# EAGLE board Small Antenna V2.1 (EAGLE 8.2.2)
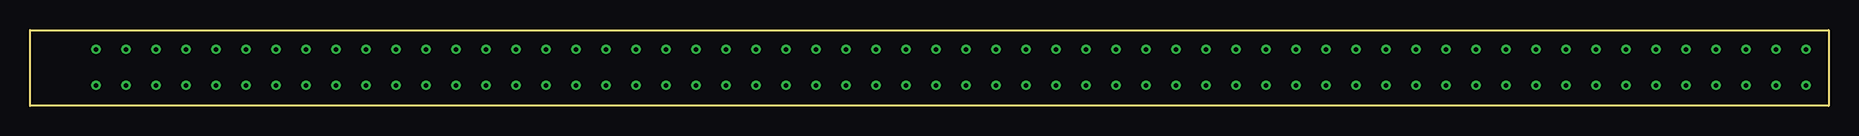
[diagram p0: board, top side]
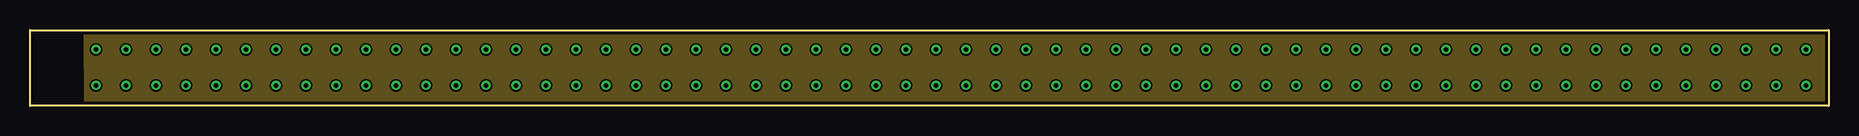
[diagram p1: board, inner layer Route2]
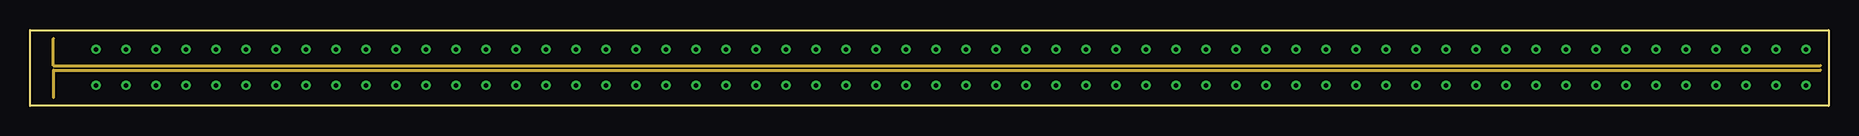
[diagram p2: board, inner layer Route15]
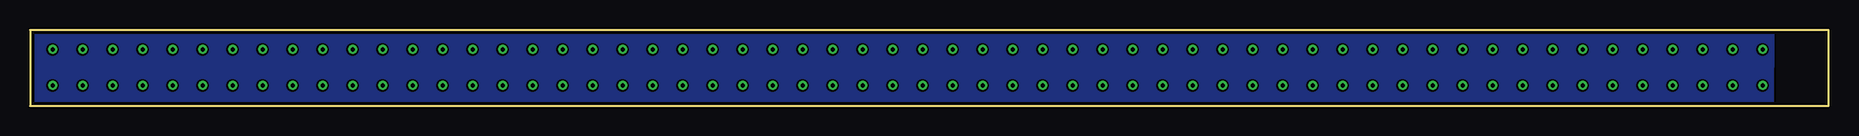
[diagram p3: board, bottom side, seen from below]

Size 149.89 x 6.32 mm. Coordinates in mm from the lower left corner, seen from the top.
Outline: 0,0 0,6.32 149.88,6.32 149.88,0 0,0
Copper layers (1*2*15*16): Top 0.035mm / dielectric 0.2mm / Route2 0.035mm / dielectric 0.2mm / Route15 0.035mm / dielectric 0.2mm / Bottom 0.035mm
Design rules "default *": minimum track width 6mil, minimum drill 0.35mm, track to track 6mil, track to pad 6mil, pad to pad 6mil, via to via 6mil, smd to smd 6mil, copper to edge 10mil, drill to drill 6mil, minimum pad ring 10mil, minimum via ring 8mil, stop-mask expansion 4mil, vias tented up to drill 0mil, thermal gap 10mil

## Footprints (pad centres in the part's own frame; a part is rotated, then mirrored left to right if it is on the bottom)
C0603 = smd 1.1 x 1: 1 -0.85,0; 2 0.85,0
R0402 = smd 0.7 x 0.9: 1 -0.65,0; 2 0.65,0
SOT23 = smd 1 x 1.4: 1 -0.95,-1.1; 2 0.95,-1.1; 3 0,1.1
D8 = smd 1.981 x 0.559: 1 -2.464,1.905; 2 -2.464,0.635; 3 -2.464,-0.635; 4 -2.464,-1.905; 5 2.464,-1.905; 6 2.464,-0.635; 7 2.464,0.635; 8 2.464,1.905
SOIC254P1030X390-8N = smd 1.7 x 1.45: 1 -4.7,3.81; 2 -4.7,1.27; 3 -4.7,-1.27; 4 -4.7,-3.81; 5 4.7,-3.81; 6 4.7,-1.27; 7 4.7,1.27; 8 4.7,3.81
BATTERYHOLDDER = smd 3 x 2.8: + -8.1,-0.1; +2 8.4,-0.1 | smd 5 x 5: - 0.15,-0.1
MC-921 = smd 1 x 1.05: 1 0,1.528 | smd 1.05 x 2.2: 2@1 -1.475,0; 2@2 1.475,0

## Placement (x,y rotation side)
C1  [C0603]  90.5,45.2 0 top  (outside the outline)
C2  [C0603]  61.5,22.7 0 top  (outside the outline)
C3  [C0603]  67.5,17.2 270 top  (outside the outline)
C4  [C0603]  76,43.2 0 top  (outside the outline)
R1  [R0402]  90.5,73.2 0 top  (outside the outline)
R2  [R0402]  90.5,69.2 0 top  (outside the outline)
R3  [R0402]  90.5,65.2 0 top  (outside the outline)
R4  [R0402]  90.5,61.2 0 top  (outside the outline)
R5  [R0402]  90.5,57.2 0 top  (outside the outline)
R6  [R0402]  70.5,77.2 0 top  (outside the outline)
R7  [R0402]  64.5,64.2 0 top  (outside the outline)
R8  [R0402]  64.5,60.2 0 top  (outside the outline)
R9  [R0402]  90.5,37.2 0 top  (outside the outline)
R10  [R0402]  60,19.2 0 top  (outside the outline)
R11  [R0402]  60,15.2 0 top  (outside the outline)
R12  [R0402]  64.5,41.2 0 top  (outside the outline)
T1  BC856  [SOT23]  64.5,55.2 0 top  (outside the outline)
U$3  TLV2761ID  [D8]  68.5,69.7 0 top  (outside the outline)
U$5  HCNR200  [SOIC254P1030X390-8N]  79,29.2 90 top  (outside the outline)
U$12  CR1025BATTERYHOLDER  [BATTERYHOLDDER]  99.5,30.7 90 top  (outside the outline)
X1  MC-921  [MC-921]  60.5,29.2 0 top  (outside the outline)

## Library data of the parts
C1-C4 = eagle-ltspice; SPICEMODEL: NONE; SPICEPREFIX: C
R1-R12 = eagle-ltspice; SPICEMODEL: NONE; SPICEPREFIX: R
T1 = nxp_60_1_1
U$3 = TLV2761-SOIC8; MANUFACTURER_PART_NUMBER: tlv2761_d_8; VENDOR: Texas Instruments
U$5 = IL300
U$12 = MyParts
X1 = con-coax; OC_FARNELL: unknown; OC_NEWARK: unknown

## Nets
GND: U$5.5 X1.2@1 X1.2@2
N$1: R1.2 R2.2
N$2: R1.1 R3.2
N$3: C1.2 R2.1 R4.2
N$4: C1.1 R3.1 R5.2
N$5: R4.1 R6.2 U$3.2
N$6: R5.1 U$3.3
N$7: R6.1 R7.2 U$3.1
N$8: C4.2 R7.1 R8.2 U$3.6 U$5.3
N$9: R9.1
N$10: R12.2 T1.2
N$11: C4.1 T1.1 U$3.7
N$12: T1.3 U$5.2
N$13: U$5.6 X1.1
VCM: C2.1 R9.2 R10.1 R11.2 U$3.5 U$5.4
VHF: C3.1 R8.1 R10.2 R12.1 U$3.8 U$12.+ U$12.+2
VHL: U$3.4 U$5.1
VLF: C2.2 C3.2 R11.1 U$12.-

## Tracks (layer width: path | path; a pad name or v marks a point on that pad's centre or on a via)
GND  (2 unrouted)
N$1  (1 unrouted)
N$2  (1 unrouted)
N$3  (2 unrouted)
N$4  (2 unrouted)
N$5  (2 unrouted)
N$6  (1 unrouted)
N$7  (2 unrouted)
N$8  (4 unrouted)
N$10  (1 unrouted)
N$11  (2 unrouted)
N$12  (1 unrouted)
N$13  (1 unrouted)
S$1
  Route15 0.254: 1.96,0.71 1.96,2.97 149.22,2.97
S$2
  Route15 0.254: 1.96,5.61 1.96,3.35 149.2,3.35
S$3  (via drill 0.35)
  other vias: 5.5,4.7
S$4  (via drill 0.35)
  other vias: 10.5,4.7
S$5  (via drill 0.35)
  other vias: 13,4.7
S$6  (via drill 0.35)
  other vias: 8,4.7
S$7  (via drill 0.35)
  other vias: 15.5,4.7
S$8  (via drill 0.35)
  other vias: 18,4.7
S$9  (via drill 0.35)
  other vias: 20.5,4.7
S$10  (via drill 0.35)
  other vias: 23,4.7
S$11  (via drill 0.35)
  other vias: 25.5,4.7
S$12  (via drill 0.35)
  other vias: 28,4.7
S$13  (via drill 0.35)
  other vias: 30.5,4.7
S$14  (via drill 0.35)
  other vias: 33,4.7
S$15  (via drill 0.35)
  other vias: 35.5,4.7
S$16  (via drill 0.35)
  other vias: 38,4.7
S$17  (via drill 0.35)
  other vias: 40.5,4.7
S$18  (via drill 0.35)
  other vias: 43,4.7
S$19  (via drill 0.35)
  other vias: 45.5,4.7
S$20  (via drill 0.35)
  other vias: 48,4.7
S$21  (via drill 0.35)
  other vias: 50.5,4.7
S$22  (via drill 0.35)
  other vias: 53,4.7
S$23  (via drill 0.35)
  other vias: 55.5,4.7
S$24  (via drill 0.35)
  other vias: 58,4.7
S$25  (via drill 0.35)
  other vias: 60.5,4.7
S$26  (via drill 0.35)
  other vias: 63,4.7
S$27  (via drill 0.35)
  other vias: 65.5,4.7
S$28  (via drill 0.35)
  other vias: 68,4.7
S$29  (via drill 0.35)
  other vias: 70.5,4.7
S$30  (via drill 0.35)
  other vias: 73,4.7
S$31  (via drill 0.35)
  other vias: 75.5,4.7
S$32  (via drill 0.35)
  other vias: 78,4.7
S$33  (via drill 0.35)
  other vias: 80.5,4.7
S$34  (via drill 0.35)
  other vias: 83,4.7
S$35  (via drill 0.35)
  other vias: 85.5,4.7
S$36  (via drill 0.35)
  other vias: 88,4.7
S$37  (via drill 0.35)
  other vias: 90.5,4.7
S$38  (via drill 0.35)
  other vias: 93,4.7
S$39  (via drill 0.35)
  other vias: 95.5,4.7
S$40  (via drill 0.35)
  other vias: 98,4.7
S$41  (via drill 0.35)
  other vias: 100.5,4.7
S$42  (via drill 0.35)
  other vias: 103,4.7
S$43  (via drill 0.35)
  other vias: 105.5,4.7
S$44  (via drill 0.35)
  other vias: 108,4.7
S$45  (via drill 0.35)
  other vias: 110.5,4.7
S$46  (via drill 0.35)
  other vias: 113,4.7
S$47  (via drill 0.35)
  other vias: 115.5,4.7
S$48  (via drill 0.35)
  other vias: 118,4.7
S$49  (via drill 0.35)
  other vias: 120.5,4.7
S$50  (via drill 0.35)
  other vias: 123,4.7
S$51  (via drill 0.35)
  other vias: 125.5,4.7
S$52  (via drill 0.35)
  other vias: 128,4.7
S$53  (via drill 0.35)
  other vias: 130.5,4.7
S$54  (via drill 0.35)
  other vias: 133,4.7
S$55  (via drill 0.35)
  other vias: 135.5,4.7
S$56  (via drill 0.35)
  other vias: 138,4.7
S$57  (via drill 0.35)
  other vias: 140.5,4.7
S$58  (via drill 0.35)
  other vias: 143,4.7
S$59  (via drill 0.35)
  other vias: 145.5,4.7
S$60  (via drill 0.35)
  other vias: 148,4.7
S$61  (via drill 0.35)
  other vias: 5.5,1.7
S$62  (via drill 0.35)
  other vias: 8,1.7
S$63  (via drill 0.35)
  other vias: 10.5,1.7
S$64  (via drill 0.35)
  other vias: 13,1.7
S$65  (via drill 0.35)
  other vias: 15.5,1.7
S$66  (via drill 0.35)
  other vias: 18,1.7
S$67  (via drill 0.35)
  other vias: 20.5,1.7
S$68  (via drill 0.35)
  other vias: 23,1.7
S$69  (via drill 0.35)
  other vias: 25.5,1.7
S$70  (via drill 0.35)
  other vias: 28,1.7
S$71  (via drill 0.35)
  other vias: 30.5,1.7
S$72  (via drill 0.35)
  other vias: 33,1.7
S$73  (via drill 0.35)
  other vias: 35.5,1.7
S$74  (via drill 0.35)
  other vias: 38,1.7
S$75  (via drill 0.35)
  other vias: 40.5,1.7
S$76  (via drill 0.35)
  other vias: 43,1.7
S$77  (via drill 0.35)
  other vias: 45.5,1.7
S$78  (via drill 0.35)
  other vias: 48,1.7
S$79  (via drill 0.35)
  other vias: 50.5,1.7
S$80  (via drill 0.35)
  other vias: 53,1.7
S$81  (via drill 0.35)
  other vias: 55.5,1.7
S$82  (via drill 0.35)
  other vias: 58,1.7
S$83  (via drill 0.35)
  other vias: 60.5,1.7
S$84  (via drill 0.35)
  other vias: 63,1.7
S$85  (via drill 0.35)
  other vias: 65.5,1.7
S$86  (via drill 0.35)
  other vias: 68,1.7
S$87  (via drill 0.35)
  other vias: 70.5,1.7
S$88  (via drill 0.35)
  other vias: 73,1.7
S$89  (via drill 0.35)
  other vias: 75.5,1.7
S$90  (via drill 0.35)
  other vias: 78,1.7
S$91  (via drill 0.35)
  other vias: 80.5,1.7
S$92  (via drill 0.35)
  other vias: 83,1.7
S$93  (via drill 0.35)
  other vias: 85.5,1.7
S$94  (via drill 0.35)
  other vias: 88,1.7
S$95  (via drill 0.35)
  other vias: 90.5,1.7
S$96  (via drill 0.35)
  other vias: 93,1.7
S$97  (via drill 0.35)
  other vias: 95.5,1.7
S$98  (via drill 0.35)
  other vias: 98,1.7
S$99  (via drill 0.35)
  other vias: 100.5,1.7
S$100  (via drill 0.35)
  other vias: 103,1.7
S$101  (via drill 0.35)
  other vias: 105.5,1.7
S$102  (via drill 0.35)
  other vias: 108,1.7
S$103  (via drill 0.35)
  other vias: 110.5,1.7
S$104  (via drill 0.35)
  other vias: 113,1.7
S$105  (via drill 0.35)
  other vias: 115.5,1.7
S$106  (via drill 0.35)
  other vias: 118,1.7
S$107  (via drill 0.35)
  other vias: 120.5,1.7
S$108  (via drill 0.35)
  other vias: 123,1.7
S$109  (via drill 0.35)
  other vias: 125.5,1.7
S$110  (via drill 0.35)
  other vias: 128,1.7
S$111  (via drill 0.35)
  other vias: 130.5,1.7
S$112  (via drill 0.35)
  other vias: 133,1.7
S$113  (via drill 0.35)
  other vias: 135.5,1.7
S$114  (via drill 0.35)
  other vias: 138,1.7
S$115  (via drill 0.35)
  other vias: 140.5,1.7
S$116  (via drill 0.35)
  other vias: 143,1.7
S$117  (via drill 0.35)
  other vias: 145.5,1.7
S$118  (via drill 0.35)
  other vias: 148,1.7
SHIELD
  pour Bottom: 4.57,6.12 4.62,0.2 149.68,0.2 149.68,6.12
SHIELD1
  pour Route2: 4.57,6.1 4.62,0.18 149.68,0.18 149.68,6.1
VCM  (5 unrouted)
VHF  (6 unrouted)
VHL  (1 unrouted)
VLF  (3 unrouted)